# EAGLE board jduinoV2 (EAGLE 5.06)
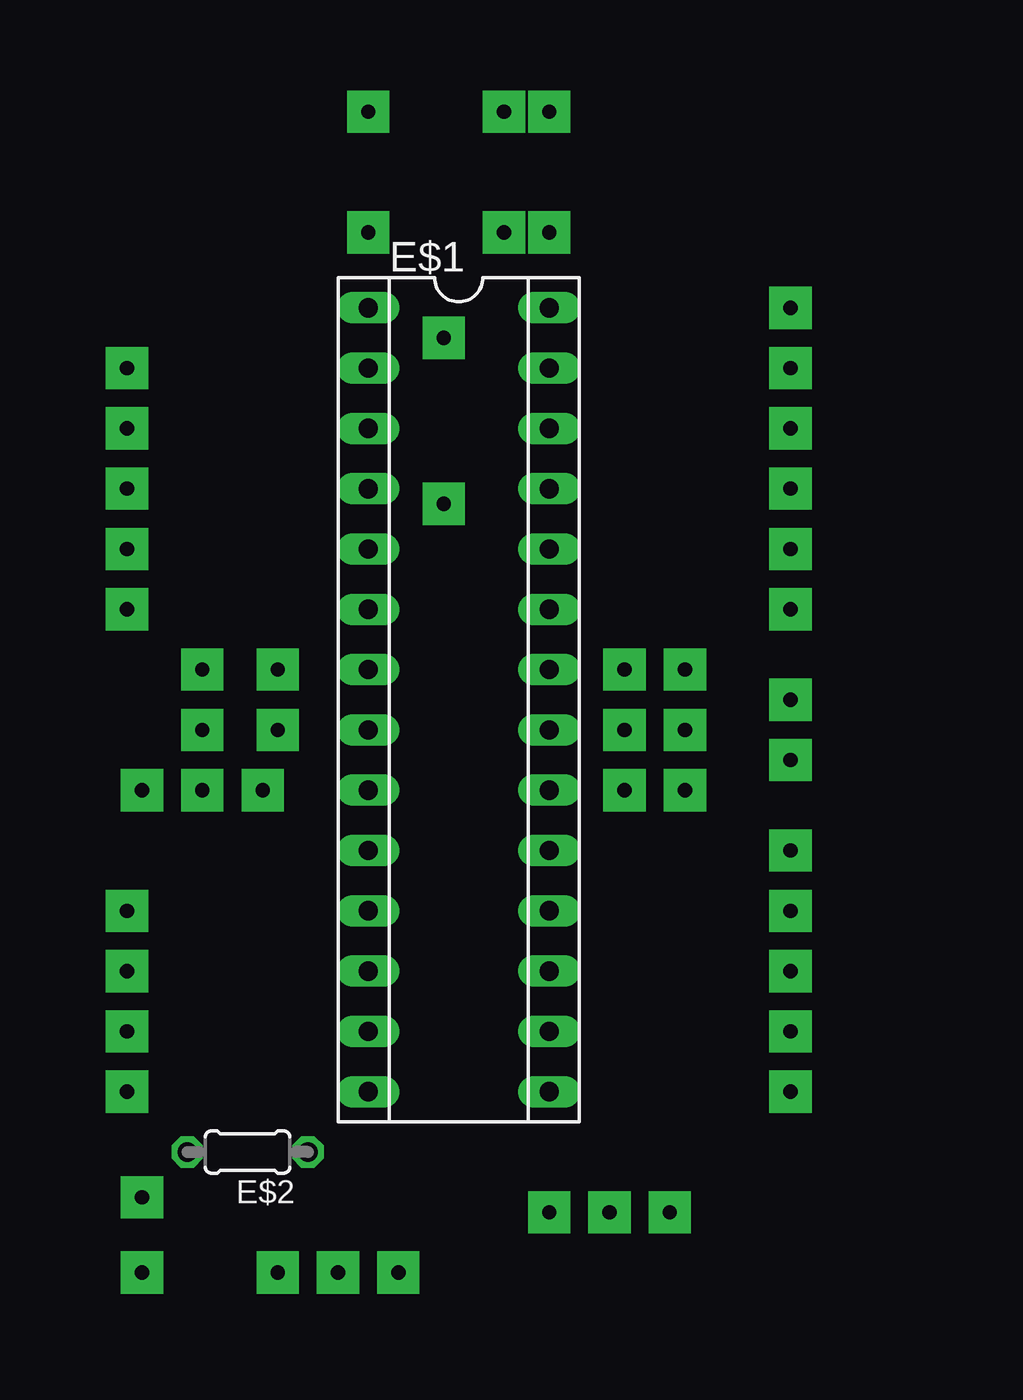
[diagram p0: board, top side]
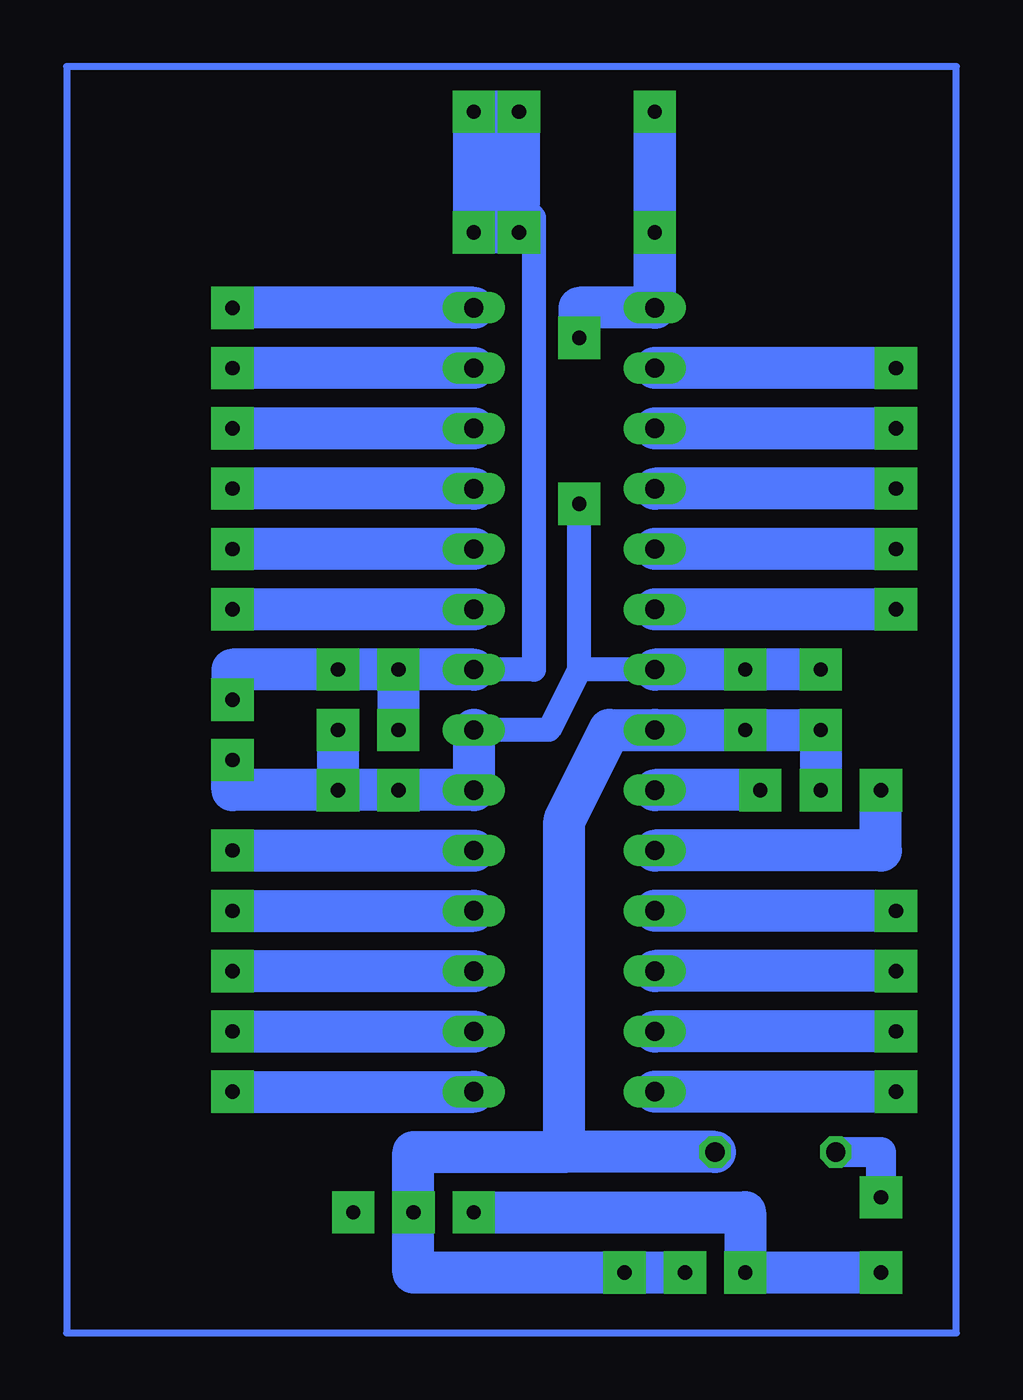
[diagram p1: board, bottom side, seen from below]

No outline drawn. Coordinates in mm, seen from the top.
Copper layers (1*16): Top 0.035mm / dielectric 1.5mm / Bottom 0.035mm
Design rules "default": minimum track width 10mil, minimum drill 24mil, track to track 8mil, track to pad 8mil, pad to pad 8mil, via to via 8mil, smd to smd 8mil, copper to edge 40mil, drill to drill 8mil, minimum pad ring 10mil, minimum via ring 8mil, stop-mask expansion 4mil, vias tented up to drill 0mil, thermal gap 10mil

## Footprints (pad centres in the part's own frame; a part is rotated, then mirrored left to right if it is on the bottom)
SOCKET-28-3 = drill 0.813 long: 1 -16.51,-3.81; 2 -13.97,-3.81; 3 -11.43,-3.81; 4 -8.89,-3.81; 5 -6.35,-3.81; 6 -3.81,-3.81; 7 -1.27,-3.81; 8 1.27,-3.81; 9 3.81,-3.81; 10 6.35,-3.81; 11 8.89,-3.81; 12 11.43,-3.81; 13 13.97,-3.81; 14 16.51,-3.81; 15 16.51,3.81; 16 13.97,3.81; 17 11.43,3.81; 18 8.89,3.81; 19 6.35,3.81; 20 3.81,3.81; 21 1.27,3.81; 22 -1.27,3.81; 23 -3.81,3.81; 24 -6.35,3.81; 25 -8.89,3.81; 26 -11.43,3.81; 27 -13.97,3.81; 28 -16.51,3.81
0204/5 = drill 0.813 octagon: 1 -2.54,0; 2 2.54,0

## Placement (x,y rotation side)
E$1  [SOCKET-28-3]  16.51,27.3 270 top
E$2  [0204/5]  7.62,8.26 180 top

## Library data of the parts
E$1 = ic-package
E$2 = rcl

## Nets
DP0: E$1.2
DP1: E$1.3
DP2: E$1.4
DP3: E$1.5
DP4: E$1.6
GND: E$1.8 E$2.1
S$1: E$1.11
S$2: E$1.12
S$3: E$1.13
S$4: E$1.14
S$7: E$1.15
S$8: E$1.28
S$9: E$1.25
S$10: E$1.26
S$11: E$1.27
S$12: E$1.24
S$13: E$1.23
S$14: E$2.2
S$20: E$1.1
S$21: E$1.22
S$29: E$1.16
S$30: E$1.17
S$31: E$1.18
S$32: E$1.19
VCC: E$1.7 E$1.20 E$1.21
XTAL1: E$1.9
XTAL2: E$1.10

## Tracks (layer width: path | path; a pad name or v marks a point on that pad's centre or on a via)
DP0  (via drill 0.6 pad 1.78)
  Bottom 1.778: v2.54,41.27 E$1.2
DP1  (via drill 0.6 pad 1.78)
  Bottom 1.778: v2.54,38.73 E$1.3
DP2  (via drill 0.6 pad 1.78)
  Bottom 1.778: v2.54,36.2 E$1.4
DP3  (via drill 0.6 pad 1.78)
  Bottom 1.778: v2.54,33.66 E$1.5
DP4  (via drill 0.6 pad 1.78)
  Bottom 1.778: v2.54,31.11 E$1.6
GND  (via drill 0.6 pad 1.78)
  Bottom 1.778: v5.71,23.5 v5.71,26.04 v8.89,26.04 E$1.8 14.61,26.04 16.51,22.23 16.51,8.26 16.76,8.26 | 16.76,8.26 22.86,8.26 v22.86,5.71 22.86,3.17 v11.43,3.17 | E$2.1 16.76,8.26
S$1  (via drill 0.6 pad 1.78)
  Bottom 1.778: v2.54,18.41 E$1.11
S$2  (via drill 0.6 pad 1.78)
  Bottom 1.778: v2.54,15.88 E$1.12
S$3  (via drill 0.6 pad 1.78)
  Bottom 1.778: v2.54,13.34 E$1.13
S$4  (via drill 0.6 pad 1.78)
  Bottom 1.778: v2.54,10.79 E$1.14
S$5  (via drill 0.6 pad 1.78)
  other vias: 12.7,46.99
S$6  (via drill 0.6 pad 1.78)
  other vias: 18.41,46.99
S$7  (via drill 0.6 pad 1.78)
  Bottom 1.778: v30.48,10.79 E$1.15
S$8  (via drill 0.6 pad 1.78)
  Bottom 1.778: E$1.28 v30.48,43.81
S$9  (via drill 0.6 pad 1.78)
  Bottom 1.778: E$1.25 v30.48,36.2
S$10  (via drill 0.6 pad 1.78)
  Bottom 1.778: E$1.26 v30.48,38.73
S$11  (via drill 0.6 pad 1.78)
  Bottom 1.778: E$1.27 v30.48,41.27
S$12  (via drill 0.6 pad 1.78)
  Bottom 1.778: E$1.24 v30.48,33.66
S$13  (via drill 0.6 pad 1.78)
  Bottom 1.778: E$1.23 v30.48,31.11
S$14  (via drill 0.6 pad 1.78)
  Bottom 1.27: E$2.2 3.17,8.26 v3.17,6.35
S$15  (via drill 0.6 pad 1.78)
  other vias: 20.32,46.99
S$16  (via drill 0.6 pad 1.78)
  Bottom 1.778: v20.32,5.71 8.89,5.71 v8.89,3.17 v3.17,3.17
S$17
  Bottom 0.305: 36.83,0.64 36.2,0.64 | 36.2,0.64 0,0.64 0,53.98 37.47,53.98 37.47,0.64 36.2,0.64
S$18  (via drill 0.6 pad 1.78)
  other vias: 25.4,5.71
S$19  (via drill 0.6 pad 1.78)
  other vias: 8.89,28.57
S$20  (via drill 0.6 pad 1.78)
  Bottom 1.778: v15.88,42.55 15.88,43.81 E$1.1 v12.7,52.07
S$21  (via drill 0.6 pad 1.78)
  Bottom 1.016: 18.41,48.26 17.78,47.62 17.78,28.57 E$1.22
  Bottom 1.778: 18.29,46.99 20.32,46.99 v20.32,52.07 19.05,52.07 | 19.05,52.07 19.05,47.62 | v30.48,27.3 30.48,28.57 v26.04,28.57 v23.5,28.57 | 19.05,52.07 v18.41,52.07 18.41,48.26 | v23.5,28.57 v23.5,26.04 | E$1.22 v23.5,28.57
S$26  (via drill 0.6 pad 1.78)
  other vias: 13.97,3.17
S$29  (via drill 0.6 pad 1.78)
  Bottom 1.778: v30.48,13.34 E$1.16
S$30  (via drill 0.6 pad 1.78)
  Bottom 1.778: v30.48,15.88 E$1.17
S$31  (via drill 0.6 pad 1.78)
  Bottom 1.778: v30.48,18.41 E$1.18
S$32  (via drill 0.6 pad 1.78)
  Bottom 1.778: v30.48,20.95 E$1.19
VCC  (via drill 0.6 pad 1.78)
  Bottom 1.016: E$1.21 17.14,26.04 15.88,28.57 | 15.88,28.57 v15.88,35.56 | E$1.7 15.88,28.57
  Bottom 1.778: v30.48,24.77 30.48,23.5 v26.04,23.5 | v26.04,23.5 v26.04,26.04 | v26.04,23.5 v23.5,23.5 E$1.20 | E$1.21 E$1.20 | E$1.21 E$1.20 | E$1.21 E$1.20 | v5.71,28.57 E$1.7
XTAL1  (via drill 0.6 pad 1.78)
  Bottom 1.778: v8.26,23.5 E$1.9
XTAL2  (via drill 0.6 pad 1.78)
  Bottom 1.778: E$1.10 3.17,20.95 v3.17,23.5
(copper drawn outside any net)
  shapes: Bottom area x2